# Altium PCB nrf52833_qiaa_var2.PcbDoc
Units mil, origin at the board's own origin, x right, y up, seen from the top; angles counter-clockwise.
Board outline 846.46 x 767.72 mil, 4 copper layers (Top Layer, Mid Layer 1, Mid Layer 2, Bottom Layer), stack 62.327 mil thick; 24 components, 60 nets, 139 pads, 108 vias.
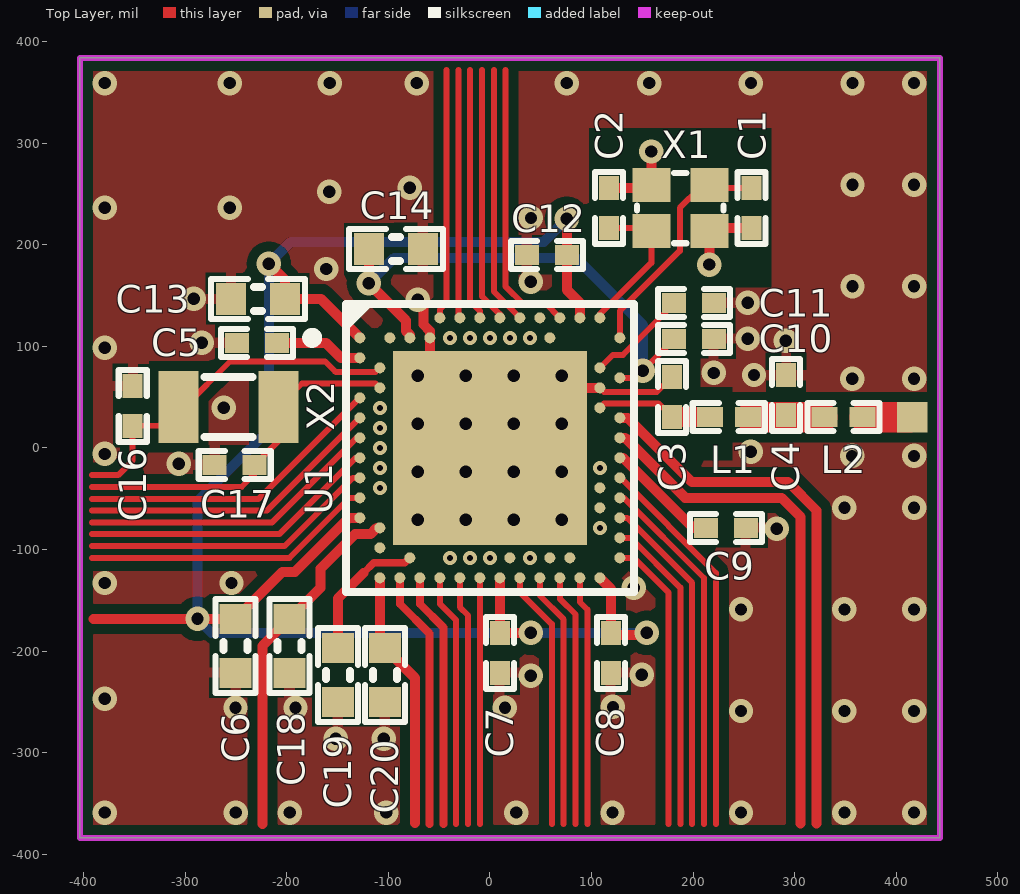
[diagram p0: Top Layer view]
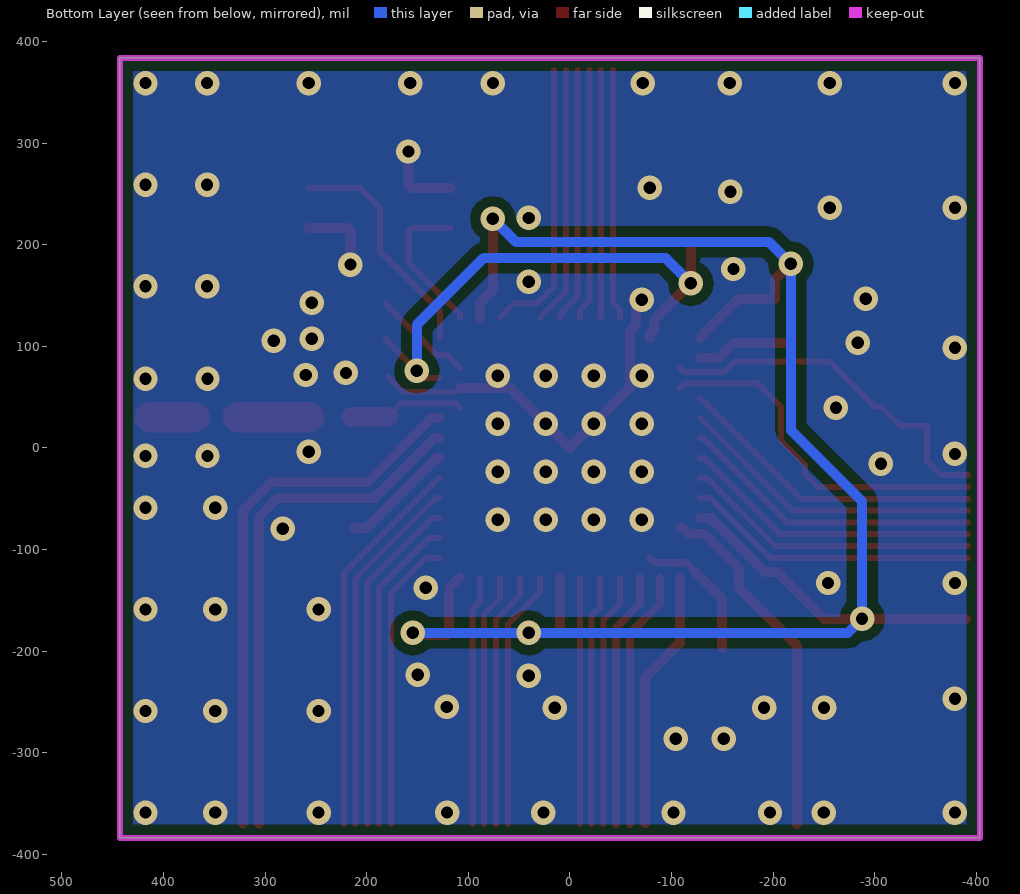
[diagram p1: Bottom Layer view, seen from below]
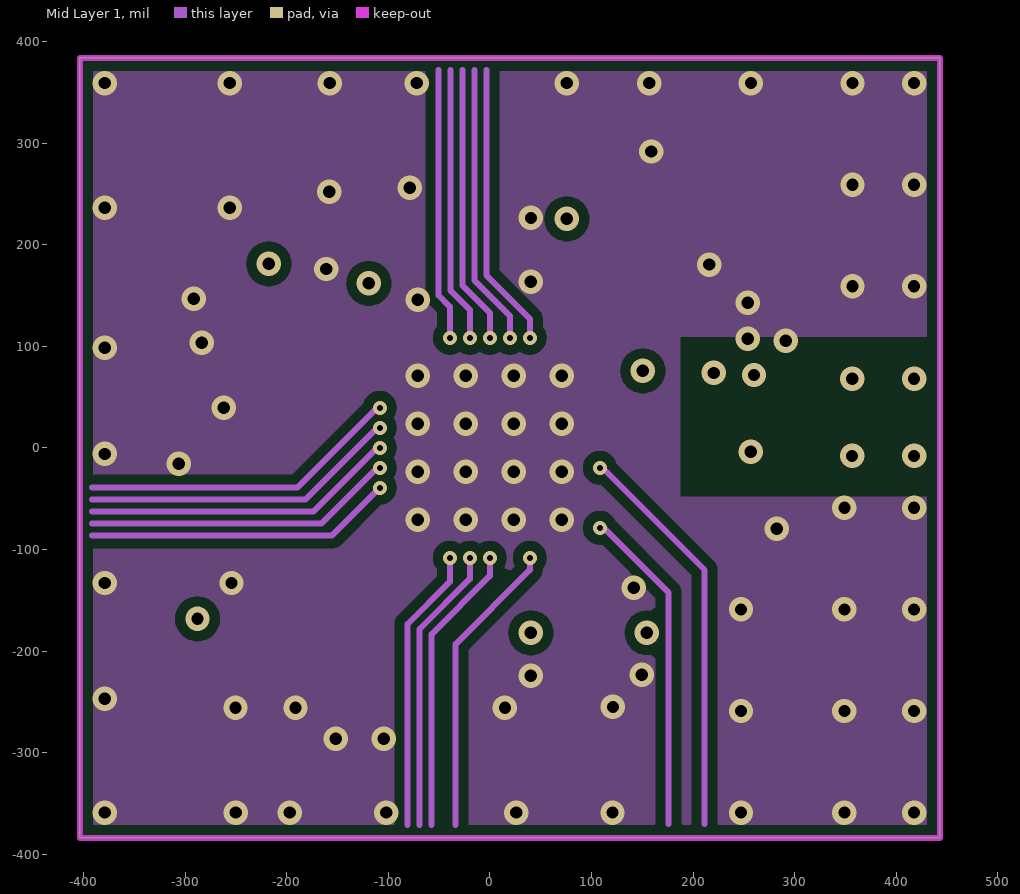
[diagram p2: Mid Layer 1]
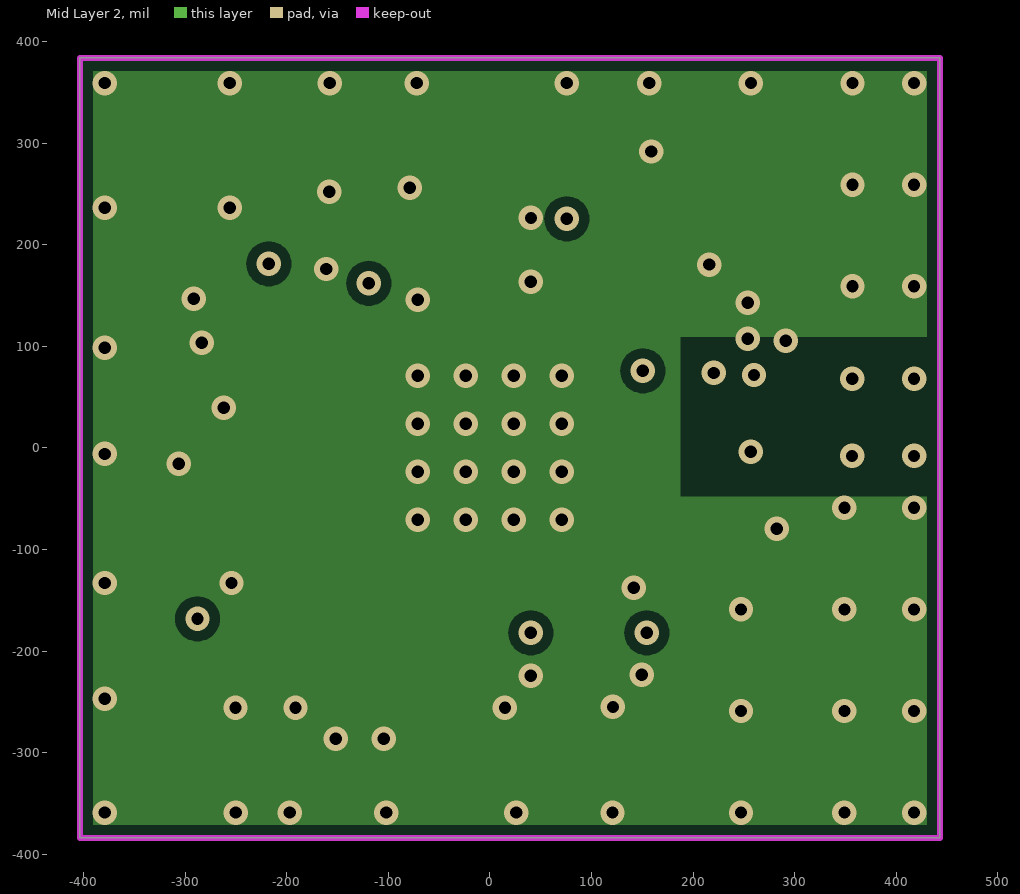
[diagram p3: Mid Layer 2]
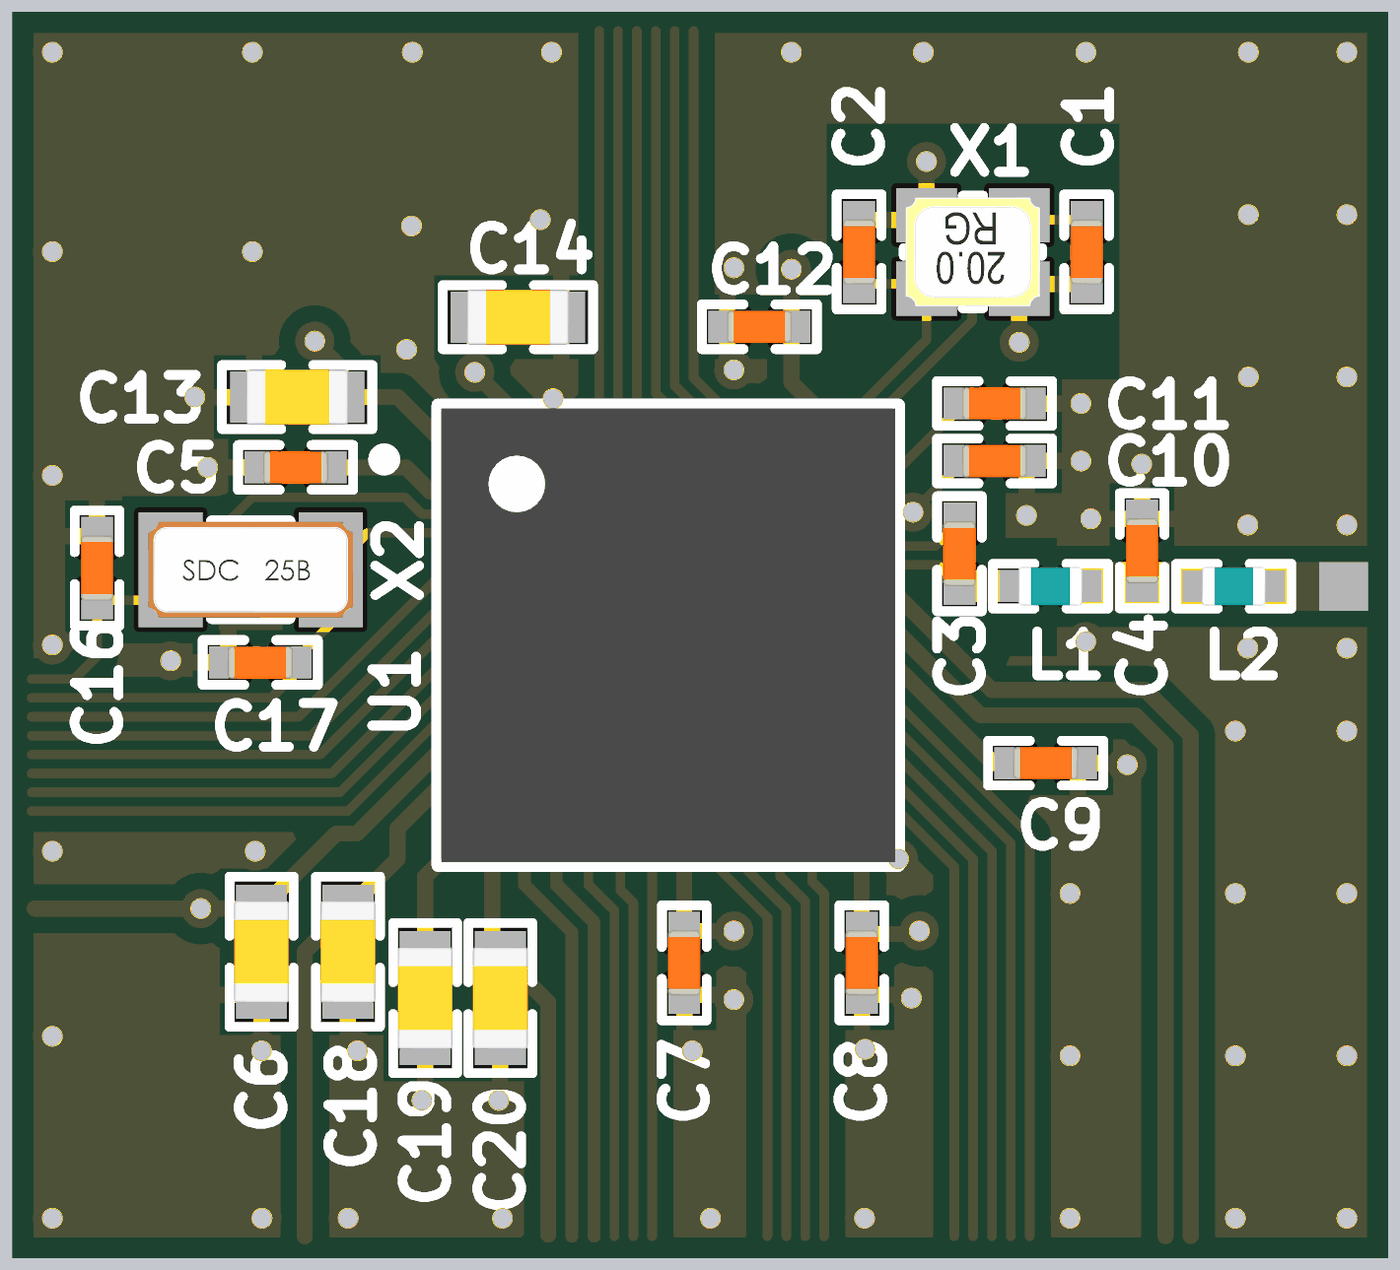
[diagram p4: 3D render of the assembled board from above, using the file's embedded part models]

## Layer stack, top to bottom
Top Solder: solder mask 0.4, Solder Resist, Dk 3.5
Top Layer: signal copper 1.4
Dielectric1: core 2.7559, FR-4, Dk 4.8
Mid Layer 1: signal copper 1.4173
Dielectric 3: prepreg 51.1811, Dk 4.2
Mid Layer 2: signal copper 1.4173
Dielectric 2: core 2.7559, Dk 4.2
Bottom Layer: signal copper 1.4
Bottom Solder: solder mask 0.4, Solder Resist, Dk 3.5

## Board outline
-403.54,-383.86 442.91,-383.86 442.91,383.86 -403.54,383.86

## Design rules (kind name [scope] priority, off if disabled: settings)
Clearance Polygon_ANT [(InNamedPolygon('Top_Layer-GND')) or  (InNamedPolygon('Mid_Layer_1-GND')) or (InNamedPolygon('Mid_Layer_2-GND')) or (InNamedPolygon('Bottom_Layer-GND')) vs InNet('RF')] p1: gap=10 ignorepadtopadclearanceinfootprint=FALSE
Clearance Polygon [(InNamedPolygon('Top_Layer-GND')) or  (InNamedPolygon('Mid_Layer_1-GND')) or (InNamedPolygon('Mid_Layer_2-GND')) or (InNamedPolygon('Bottom_Layer-GND'))] p2: gap=10 ignorepadtopadclearanceinfootprint=FALSE except(0: Arc-Hole Track-Hole SMDPad-Hole THPad-Hole Via-Hole Fill-Hole Poly-Hole Region-Hole Text-Hole)
Clearance Clearance_Top [OnLayer('Top Layer')] p3: gap=5.71 ignorepadtopadclearanceinfootprint=FALSE except(0: Arc-Hole Track-Hole SMDPad-Hole THPad-Hole Via-Hole Fill-Hole Poly-Hole Region-Hole Text-Hole)
Clearance [All] p4: gap=5.91 ignorepadtopadclearanceinfootprint=FALSE
ComponentClearance [All] p1 off: gap=10 collisioncheckmode=3 verticalgap=10 showdistances=FALSE
FabricationTestPointUsage TestPointUsage [All] p1: valid=0 allowmultiple=FALSE
FabricationTestpoint Testpoint [All] p1: side=3 testpointundercomponent=TRUE minsize=40 maxsize=100 preferedsize=60 minholesize=0 maxholesize=40 preferedholesize=32 testpointgrid=1 allowsidetop=TRUE allowsidebottom=TRUE usegrid=TRUE gridtolerance=0.01
Height [All] p1 off: minheight=0 maxheight=1000 prefheight=500
HoleSize [All] p1: absolutevalues=TRUE maxlimit=160 minlimit=3.94 maxpercent=80.000 minpercent=20.000
MinimumAnnularRing [All] p1 off: minimumring=6
PolygonConnect PolygonConnect_1 [isVia and innet(gnd)] p1: connectstyle=Direct reliefconductorwidth=10 reliefentries=4 polygonreliefangle="90 Angle" airgapwidth=10
PolygonConnect [All] p2: connectstyle=Relief reliefconductorwidth=10 reliefentries=4 polygonreliefangle="90 Angle" airgapwidth=10
RoutingVias [All] p1: holewidth=12 width=24 viastyle="Through Hole" minholewidth=3.94 minwidth=11.81 maxholewidth=12 maxwidth=24
SilkToSolderMaskClearance SilkscreenOverComponentPads [IsPad] p1: minsilkscreentomaskgap=10 clearancetoexposedcopper=TRUE
SolderMaskExpansion [All] p1: expansion=3 istentingtop=FALSE
Width [All] p1: maxlimit=78.74 minlimit=5.71 preferedwidth=5.91 minimp=50.000000 maximp=50.000000 favimp=50.000000
24 further rules are at their usual default settings.

## Components (designator, comment, footprint, x,y, rotation, side; value= is the part's Value field where it differs from the comment)
C1 "12pF" CAPC1005X04L 257.45,236.04 r270 top
C2 "12pF" CAPC1005X04L 117.45,236.04 r90 top
C3 "1.0pF" CAPC1005X04L 179.2,50.21 r270 top
C4 "1.2pF" CAPC1005X04L 291.6,52 r270 top
C5 "100nF" CAPC1005X04L -229.33,103.35 r180 top
C6 "4.7µF" CAPC1608X06L -250.28,-194.88 r270 top
C7 "100nF" CAPC1005X04L 9.84,-201.77 r270 top
C8 "100nF" CAPC1005X04L 119.09,-201.77 r270 top
C9 "820pF" CAPC1005X04L 232.28,-78.74 r0 top
C10 "N.C." CAPC1005X04L 200.79,107.28 r180 top
C11 "100pF" CAPC1005X04L 200.79,142.72 r0 top
C12 "100nF" CAPC1005X04L 56.1,189.96 r180 top
C13 "1.0µF" CAPC1608X06L -228.35,146.65 r180 top
C14 "1.0µF" CAPC1608X06L -92.52,195.87 r180 top
C16 "12pF" CAPC1005X04L -351.47,41.34 r90 top
C17 "12pF" CAPC1005X04L -251.08,-16.73 r180 top
C18 "4.7µF" CAPC1608X06L -197.13,-194.88 r270 top
C19 "4.7µF" CAPC1608X06L -149.61,-223.43 r270 top
C20 "4.7µF" CAPC1608X06L -103.35,-223.43 r270 top
L1 "4.7nH" INDC1005X04L 235.2,30.21 r0 top
L2 "2.2nH" INDC1005X04L 348,30.2 r0 top
U1 "nRF52833-QIAA" AQFN50P700X700X85_HS-74N 0,0 r0 top locked
X1 "32MHz" BT-XTAL_2016 187.45,236.04 r180 top
X2 "32.768kHz" XTAL_3215 -256.98,40.35 r0 top

## Footprints (in the part's own frame and the unit in brackets; to place one, negate y for a bottom-side part, rotate by r counter-clockwise, add the part's x,y. Pads: shape width x height; smd on the part's side, far side on the other; paste and mask are expansions set on the pad)
AQFN50P700X700X85_HS-74N [mm] "AQFN, 73-Leads, Body 7.00x7.00mm, Pitch 0.50mm, Thermal Pad 4.95x4.95mm, IPC Medium Density"
  rect 4.85x4.85 smd mask+0.05: 74(0,0)
  round 0.275 smd paste+0.012 mask+0.05: A8(-1.25,3.25) A10(-0.75,3.25) A12(-0.25,3.25) A14(0.25,3.25) A16(0.75,3.25) A18(1.25,3.25) A20(1.75,3.25) A22(2.25,3.25) A23(2.75,3.25) AA24(3.25,-2.25) AB2(-2.75,-2.5) AC5(-2,-2.75) AC9(-1,-2.75) AC11(-0.5,-2.75) AC13(0,-2.75) AC15(0.5,-2.75) AC17(1,-2.75) AC19(1.5,-2.75) AC21(2,-2.75) AC24(3.25,-2.75) AD2(-2.75,-3.25) AD4(-2.25,-3.25) AD6(-1.75,-3.25) AD8(-1.25,-3.25) AD10(-0.75,-3.25) AD12(-0.25,-3.25) AD14(0.25,-3.25) AD16(0.75,-3.25) AD18(1.25,-3.25) AD20(1.75,-3.25) AD22(2.25,-3.25) AD23(2.75,-3.25) B1(-3.25,2.75) B3(-2.5,2.75) B5(-2,2.75) B7(-1.5,2.75) B9(-1,2.75) B11(-0.5,2.75) B13(0,2.75) B15(0.5,2.75) B17(1,2.75) B19(1.5,2.75) B24(3.25,2.75) C1(-3.25,2.25) D2(-2.75,2) D23(2.75,2) E24(3.25,1.75) F2(-2.75,1.5) F23(2.75,1.5) G1(-3.25,1.25) H2(-2.75,1) H23(2.75,1) J1(-3.25,0.75) J24(3.25,0.75) K2(-2.75,0.5) L1(-3.25,0.25) L24(3.25,0.25) M2(-2.75,0) N1(-3.25,-0.25) N24(3.25,-0.25) P2(-2.75,-0.5) P23(2.75,-0.5) R1(-3.25,-0.75) R24(3.25,-0.75) T2(-2.75,-1) T23(2.75,-1) U1(-3.25,-1.25) U24(3.25,-1.25) V23(2.75,-1.5) W1(-3.25,-1.75) W24(3.25,-1.75) Y2(-2.75,-2) Y23(2.75,-2)
  silkscreen extent -4.56,-3.6 3.6,3.6, body extent -3.55,-3.55 3.55,3.55, height 0.85
BT-XTAL_2016 [mm] "Crystal 2.0 x 1.6 mm"
  rect 0.95x0.85 smd: 1(-0.725,-0.575) 2(0.725,-0.575) 3(0.725,0.575) 4(-0.725,0.575)
  silkscreen extent -1.08,-0.88 1.08,0.88, body extent -1.05,-0.85 1.05,0.85, height 0.56
CAPC1005X04L [mm] "Chip Capacitor, 2-Leads, Body 1.0x0.5mm, IPC High Density"
  rect 0.6x0.5 smd: 1(-0.5,0) 2(0.5,0)
  silkscreen extent -0.9,-0.35 0.9,0.35, body extent -0.51,-0.25 0.51,0.25, height 0.5
CAPC1608X06L [mm] "Chip Capacitor, 2-Leads, Body 1.6x0.8mm, IPC High Density"
  rect 0.75x0.8 smd: 1(-0.675,0) 2(0.675,0)
  silkscreen extent -1.17,-0.5 1.17,0.5, body extent -0.8,-0.43 0.8,0.43, height 0.8
INDC1005X04L [mm] "Chip Inductor, 2-Leads, Body 1.0x0.5mm, IPC High Density"
  rect 0.65x0.5 smd: 1(-0.475,0) 2(0.475,0)
  silkscreen extent -0.9,-0.35 0.9,0.35, body extent -0.5,-0.3 0.5,0.3, height 0.5
XTAL_3215 [mm] "XTAL SMD 3.2 x 1.5 mm"
  rect 1x1.8 smd: 1(-1.25,0) 2(1.25,0)
  silkscreen extent -0.6,-0.75 0.6,0.75, body extent -1.6,-0.75 1.6,0.75, height 0.81

## Part data
C1 C2 C16 C17: library part C0402-12p, "Capacitor, NP0, ±2%", Footprint Doc=0402, LatestRevisionDate=2011-05-11, Note=50V, Part Number=C0402-12p, Pin Count=2, Published=2009-05-08, Publisher="Nordic Semiconductor"
C3: library part C0402-1.0p, "Capacitor, NP0, ±5%", Footprint Doc=0402, LatestRevisionDate=2017-02-23, Note=50V, Part Number=C0402-1.0p, Pin Count=2, Published=2009-05-08, Publisher="Nordic Semiconductor"
C4: library part C0402-1.2p, "Capacitor, NP0, ±5%", Footprint Doc=0402, LatestRevisionDate=2011-05-11, Note=50V, Part Number=C0402-1.2p, Pin Count=2, Published=2009-05-08, Publisher="Nordic Semiconductor"
C5 C7 C8 C12: library part C0402-100n, "Capacitor, X7R, ±10%", Footprint Doc=0402, LatestRevisionDate=2009-11-23, Note=16V, Part Number=C0402-100n, Pin Count=2, Published=2009-05-08, Publisher="Nordic Semiconductor"
C6 C19: library part C0603-4µ7-6.3V-X7R, "Capacitor, X7R, ±10%", Footprint Doc=0603, LatestRevisionDate=2015-06-10, Note=6.3V, Part Number=C0603-4µ7-6.3V-X7R, Pin Count=2, Published=2015-06-10, Publisher="Nordic Semiconductor"
C9: library part C0402-820p, "Capacitor, NP0, ±5%", Assembly="Not required for Bxx and later", Footprint Doc=0402, LatestRevisionDate=2009-05-08, Note=50V, Part Number=C0402-820p, Pin Count=2, Published=2009-05-08, Publisher="Nordic Semiconductor"
C10: library part C0402-N.C., "Not mounted", Assembly="Not mounted", Footprint Doc=0402, LatestRevisionDate=2009-05-08, Part Number=C0402-N.C., Pin Count=2, Published=2009-05-08, Publisher="Nordic Semiconductor"
C11: library part C0402-100p, "Capacitor, NP0, ±5%", Footprint Doc=0402, LatestRevisionDate=2009-05-08, Note=50V, Part Number=C0402-100p, Pin Count=2, Published=2009-05-08, Publisher="Nordic Semiconductor"
C13 C14: library part C0603-1µ0, "Capacitor, X7R, ±10%", Footprint Doc=0603, LatestRevisionDate=2013-06-05, Note=16V, Part Number=C0603-1µ0, Pin Count=2, Published=2009-05-08, Publisher="Nordic Semiconductor"
C18 C20: library part C0603-4µ7-10V-X7S, "Capacitor, X7S, ±10%", Footprint Doc=0603, LatestRevisionDate=2016-08-15, Note=10V, Part Number=C0603-4µ7-10V-X7S, Pin Count=2, Published=2016-08-15, Publisher="Nordic Semiconductor"
L1: library part L0402-4n7, "High frequency chip inductor ±5%", Footprint Doc=0402, LatestRevisionDate=2012-09-19, Note="High frequency chip inductor ±5%", Part Number=L0402-4n7, Pin Count=2, Published=2009-05-08, Publisher="Nordic Semiconductor"
L2: library part L0402-2n2, "High frequency chip inductor ±5%", Footprint Doc=0402, LatestRevisionDate=2012-09-19, Note="High frequency chip inductor ±5%", Part Number=L0402-2n2, Pin Count=2, Published=2009-05-08, Publisher="Nordic Semiconductor"
U1: "Multi-protocol Bluetooth Low Energy, IEEE 802.15.4, ANT and 2.4GHz proprietary system-on-chip", Manufacturer="Nordic Semiconductor", Footprint Doc=AQFN-73, LatestRevisionDate=2018-12-03, Manufacturer Part Number=nRF52833-QIAA, Part Number=nRF52833-QIAA, Pin Count=73, Published=2018-12-03, Publisher="Nordic Semiconductor"
X1: library part XTAL_SMD2016_32MHz_8pF_General, "XTAL SMD 2016, 32MHz, Cl=8pF, Total Tol: ±40ppm", Footprint Doc=XTAL_2016, LatestRevisionDate=2016-08-19, Part Number=XTAL_SMD2016_32MHz_8pF_General, Pin Count=4, Published=2016-08-19, Publisher="Nordic Semiconductor"
X2: library part XTAL_SMD3215_32.768kHz_9pF_General, "XTAL SMD 3215, 32.768kHz, Cl=9pF, Total Tol: ±50ppm", Footprint Doc=XTAL_3215, LatestRevisionDate=2016-08-19, Part Number=XTAL_SMD3215_32.768kHz_9pF_General, Pin Count=2, Published=2016-08-19, Publisher="Nordic Semiconductor"

## Free pads (board coordinates)
  rect 30x30 smd mask+3: 0(415.63,30)
  round 11.81 on Mech16: 1(-108.27,-39.37) 1(-108.27,-19.69) 1(-108.27,0) 1(-108.27,19.68) 1(-108.27,39.37) 1(-39.37,-108.27) 1(-39.37,108.27) 1(-19.69,-108.27) 1(-19.69,108.27) 1(0,-108.27) 1(0,108.27) 1(19.69,108.27) 1(39.37,-108.27) 1(39.37,108.27) 1(108.27,-78.74) 1(108.27,-19.69)

## Via types
v1: diameter 24, hole 12, Top Layer to Bottom Layer, tented both sides, 92 vias
v2: diameter 13.78, hole 5.91, Top Layer to Mid Layer 1, tented top, 16 vias

## Nets (pads, with @x,y where several pads share a name; then routed paths per layer and width w, separated by ;. In a path a pad name is that pad's centre, name@x,y a point inside that pad or via, vN(x,y) a via of type N, cw(c..) or ccw(c..) an arc to the next point about the centre after c; other vN are vias at no path point)
D+: U1.AD6 | length 251.7
  Top Layer w7.87: U1.AD6 -68.9,-153.54 -45.67,-176.77 -45.67,-370.08
D-: U1.AD4 | length 254.3
  Top Layer w7.87: U1.AD4 -88.58,-153.54 -59.25,-182.87 -59.25,-370.08
DEC1: C5.1 U1.C1 | length 87.8
  Top Layer w9.84: C5.1 -161.42,103.35 -146.65,88.58 U1.C1
DEC3: C11.1 U1.D23 | length 100
  Top Layer w5.91: U1.D23 108.49,78.74 121.28,91.54 131.13,91.54 181.1,141.51 C11.1
DEC4_6: C10.2 C14.2 U1.B5 U1.E24 | length 526.6
  Top Layer w5.91: U1.E24 143.7,68.9 v1(150.59,75.79) 181.1,106.3 C10.2
  Top Layer w9.84: C14.2 v1(-119.09,161.89) -82.68,125.48 -82.68,115.21 -78.74,111.27 U1.B5
  Bottom Layer w9.84: v1(-119.09,161.89) -93.99,187 84.65,187 150.59,121.06 v1(150.59,75.79)
GND: C1.2 C2.2 C3.1 C4.1 C5.2 C6.2 C7.2 C8.2 C9.2 C10.1 C11.2 C12.2 C13.2 C14.1 C16.2 C17.2 C18.2 C19.2 C20.2 U1.74 U1.B7 U1.F23 X1.2 X1.4 | length 531
  Top Layer w5.71: U1.F23 112.4,54.92 164.22,54.92 C3.1
  Top Layer w9.84: v1@-65.26,143.41 -65.26,121.31 -59.06,115.11 U1.B7 -59.06,59.06 U1.74 v1(23.62,23.62) 59.06,59.06 U1.F23 ; C2.2 155.95,255.72 X1.2 ; X1.2@157.68,259.9 X1.2 ; v1(158.91,291.71) X1.2 ; v1(215.99,180.37) X1.4 ; X1.4@218.94,216.35 C1.2
  other v1: -379,-359 -250,-359 -197,-359 -102,-359 26,-359 120.8,-359 247.22,-359 349,-359 417.64,-359 -151.57,-286.42 -104.33,-286.42 247.22,-259 349,-259 417.64,-259 -250.28,-255.91 -191.22,-255.91 14.83,-255.91 121.09,-254.95 -379,-247 40.35,-224.41 149.61,-223.43 247.22,-159 349,-159 417.64,-159 141.73,-137.8 -379,-133 -254.21,-133 282.48,-79.72 -70.87,-70.87 -23.62,-70.87 23.62,-70.87 70.87,-70.87 349,-59 417.64,-59 -70.87,-23.62 -23.62,-23.62 23.62,-23.62 70.87,-23.62 -306.18,-15.75 356.62,-7.94 417.64,-7.94 -379,-6 256.89,-3.94 -70.87,23.62 -23.62,23.62 70.87,23.62 -261.91,39.37 356.64,67.9 417.64,67.9 -70.87,70.87 -23.62,70.87 23.62,70.87 70.87,70.87 260,71.69 220.44,73.79 -379,98.43 -283.46,103.35 291.34,105.35 253.94,107.28 253.94,142.72 -70.87,145.67 -291.34,146.65 357,159 417.64,159 40.35,163.39 -161,176 40.42,226.28 -379,236.22 -255.91,236.22 -158,252 -78.74,255.91 357,259 417.64,259 -379,359 -255.91,359 -157.48,359 -71.85,359 75.74,359 157,359 257,359 357,359 417.64,359
NetC3_2: C3.2 L1.1 U1.H23 | length 113.7
  Top Layer w5.71: U1.H23 112.4,43.5 166.15,43.5 179.32,30.34 C3.2@179.51,30.14
  Top Layer w20: C3.2@179.32,30.34 L1.1@214.51,30.34
NetC4_2: C4.2 L1.2 L2.1 | length 70.4
  Top Layer w30: L1.2@256.6,30 L2.1@327,30
NetC9_1: C9.1 U1.N24 | length 113.2
  Top Layer w9.84: U1.N24 130.96,-9.84 199.85,-78.74 C9.1
NetC19_1: C19.1 U1.AC5 | length 135.9
  Top Layer w7.24: -124.31,-123.14 -114.37,-113.21 -83.68,-113.21 U1.AC5
  Top Layer w9.84: C19.1 -149.61,-148.44 -124.31,-123.14
P0.00/XL1: C16.1 U1.D2 X2.1 | length 355.9
  Top Layer w5.71: C16.1 -324.9,21.65 X2.1 -300.2,40.35 -255.61,84.94 -162.08,84.94 -152.24,75.1 -151.87,75.1 -151.38,74.61 -112.4,74.61 U1.D2
  Top Layer w5.91: -391.73,-26.97 -365.76,-26.97 -351.47,-12.68 C16.1
P0.01/XL2: C17.1 U1.F2 X2.2 | length 352.1
  Top Layer w5.71: C17.1 -207.77,6.89 X2.2 -184.94,63.19 -112.4,63.19 U1.F2
  Top Layer w5.91: -391.73,-38.58 -244.39,-38.58 -231.39,-25.59 C17.1
P0.02/AIN0: U1.A12 | length 248
  Top Layer w5.91: -19.29,372.05 -19.29,144.29 -9.84,134.84 U1.A12
P0.03/AIN1: U1.B13 | length 274.8
  Mid Layer 1 w5.91: -26.76,372 -26.76,159.65 0,132.89 v2(0,108.27)
P0.04/AIN2: U1.J1 | length 301.6
  Top Layer w5.91: -391.73,-61.81 -219.51,-61.81 -128.17,29.53 U1.J1
P0.05/AIN3: U1.K2 | length 312.5
  Mid Layer 1 w5.91: -391.6,-50.81 -181.35,-50.81 -110.85,19.68 v2(-108.27,19.68)
P0.06: U1.L1 | length 298.3
  Top Layer w5.91: -391.73,-73.43 -214.17,-73.43 -130.91,9.84 U1.L1
P0.07: U1.M2 | length 309.3
  Mid Layer 1 w5.91: -391.6,-62.62 -173.48,-62.62 -110.85,0 v2(-108.27,0)
P0.08: U1.N1 | length 294.9
  Top Layer w5.91: -391.73,-85.04 -207.09,-85.04 -131.89,-9.84 U1.N1
P0.09/NFC1: U1.L24 | length 512.3
  Top Layer w9.84: U1.L24 133.26,9.84 192.32,-49.21 287.21,-49.21 306,-68 306,-370
P0.10/NFC2: U1.J24 | length 539.8
  Top Layer w9.84: U1.J24 135.57,29.53 198.76,-33.66 293.65,-33.66 321.55,-61.56 321.55,-370
P0.11: U1.T2 | length 303.7
  Mid Layer 1 w5.91: -391.6,-86.24 -155.14,-86.24 v2(-108.27,-39.37) v2@-109.18,-39.37
P0.12: U1.U1 | length 288.2
  Top Layer w5.91: -391.73,-108.27 -197.16,-108.27 -138.1,-49.21 U1.U1
P0.13: U1.AD8 | length 248.8
  Top Layer w5.91: U1.AD8 -49.21,-153.54 -33.07,-169.69 -33.07,-370.08
P0.14: U1.AC9 | length 280
  Mid Layer 1 w5.91: -80.99,-371 -80.99,-173.58 -39.37,-131.96 v2(-39.37,-108.27)
P0.15: U1.AD10 | length 245.5
  Top Layer w5.91: U1.AD10 -29.53,-156.8 -21.46,-164.87 -21.46,-370.08
P0.16: U1.AC11 | length 283.2
  Mid Layer 1 w5.91: -69.18,-371 -69.18,-178.47 -19.69,-128.98 v2(-19.69,-108.27)
P0.17: U1.AD12 | length 242.1
  Top Layer w5.91: -9.84,-370.08 U1.AD12
P0.18/RESET: U1.AC13 | length 286.5
  Mid Layer 1 w6: -57.32,-371 -57.32,-183.39 0,-126.06 v2(0,-108.27)
P0.19: U1.A14 | length 251.4
  Top Layer w5.91: -7.68,372.05 -7.68,149.1 9.84,131.58 U1.A14
P0.20: U1.AD16 | length 255.2
  Top Layer w5.91: U1.AD16 29.53,-142.04 61.02,-173.54 61.02,-370.08
P0.21: U1.AC17 | length 293
  Mid Layer 1 w5.91: -33.65,-371 -33.65,-193.19 39.37,-120.17 v2(39.37,-108.27)
P0.22: U1.AD18 | length 251.8
  Top Layer w5.91: U1.AD18 49.21,-145.3 72.68,-168.77 72.68,-370.08
P0.23: U1.B17 | length 281.3
  Mid Layer 1 w5.91: -3.14,372 -3.14,169.44 39.37,126.93 v2(39.37,108.27)
P0.24: U1.AD20 | length 248.5
  Top Layer w5.91: U1.AD20 68.9,-148.56 84.3,-163.96 ; 84.35,-370.08 84.35,-163.96
P0.25: U1.A20 | length 279.3
  Top Layer w5.91: 15.55,372.05 15.55,158.72 32.25,142.03 55.04,142.03 U1.A20@68.9,128.17
P0.26: U1.G1 | length 305
  Top Layer w5.91: -391.73,-50.2 -227.58,-50.2 -128.17,49.21 U1.G1
P0.27: U1.H2 | length 315.8
  Mid Layer 1 w5.91: -391.6,-39 -189.22,-39 -110.85,39.37 v2(-108.27,39.37)
P0.28/AIN4: U1.B11 | length 271.6
  Mid Layer 1 w5.91: -38.57,372 -38.57,154.76 -19.69,135.87 v2(-19.69,108.27)
P0.29/AIN5: U1.A10 | length 244.7
  Top Layer w5.91: -30.91,372.05 -30.91,129.33 U1.A10
P0.30/AIN6: U1.B9 | length 268.3
  Mid Layer 1 w5.91: -50.39,372 -50.39,149.87 -39.37,138.85 v2(-39.37,108.27)
P0.31/AIN7: U1.A8 | length 246.9
  Top Layer w5.91: U1.A8 -49.21,136.22 -42.52,142.91 -42.52,372.05
P1.00: U1.AD22 | length 245.2
  Top Layer w5.91: U1.AD22 88.58,-151.77 95.96,-159.15 95.96,-370.08
P1.01: U1.Y23 | length 321.7
  Mid Layer 1 w5.91: v2(108.27,-78.74) 112.18,-78.74 176,-142.57 176,-370.08
P1.02: U1.W24 | length 335
  Top Layer w5.91: U1.W24 135.21,-68.9 199.23,-132.91 199.23,-370.08
P1.03: U1.B15 | length 278.1
  Mid Layer 1 w5.91: -14.95,372 -14.95,164.55 19.68,129.91 v2(19.68,108.27)
P1.04: U1.U24 | length 357.5
  Top Layer w5.91: U1.U24 131.95,-49.21 210.84,-128.1 210.84,-370.08
P1.05: U1.A16 | length 254.7
  Top Layer w5.91: 3.94,372.05 3.94,153.91 29.53,128.32 U1.A16
P1.06: U1.R24 | length 380.1
  Top Layer w5.91: U1.R24 128.69,-29.53 222.46,-123.29 222.46,-370.08
P1.07: U1.P23 | length 394.6
  Mid Layer 1 w5.91: v2(108.27,-19.69) 110.85,-19.69 211.43,-120.26 211.43,-370.08
P1.08: U1.P2 | length 306
  Mid Layer 1 w5.91: -391.6,-74.43 -165.6,-74.43 -110.85,-19.69 v2(-108.27,-19.69)
P1.09: U1.R1 | length 291.6
  Top Layer w5.91: -391.73,-96.65 -201.97,-96.65 -134.84,-29.53 U1.R1
RF: L2.2 pad.0 | length 44.4
  Top Layer w30: L2.2@369,30 pad.0@413.39,30
SWDCLK: U1.AA24 | length 312.4
  Top Layer w5.91: U1.AA24 138.47,-88.58 187.61,-137.72 187.61,-370.08
SWDIO: U1.AC24 | length 289.8
  Top Layer w5.91: U1.AC24 141.73,-108.27 176,-142.54 176,-370.08
VBUS: C20.1 U1.AD2 | length 255.4
  Top Layer w9.84: U1.AD2 -108.27,-191.93 C20.1 -73.82,-226.38 -73.82,-369.09
VDD_NRF: C6.1 C7.1 C8.1 C12.1 C13.1 U1.A22 U1.AD14 U1.AD23 U1.B1 U1.W1 | length 1883.4
  Top Layer w9.84: -389.91,-168.31 v1(-287.68,-168.31) C6.1 -204.02,-122.05 -191.73,-122.05 -138.58,-68.9 U1.W1 ; v1(-217.52,181.1) -201.77,165.35 C13.1 -166.34,146.65 U1.B1 ; U1.AD14 C7.1 v1(40.35,-182.09) ; C12.1 75.79,155.51 88.58,142.72 U1.A22 ; C12.1@75.79,195.87 v1(75.79,225.39) 75.79,190.94 C12.1@76.28,190.45 ; U1.AD23 119.09,-138.78 C8.1 121.06,-184.06 v1@154.53,-184.06
  Bottom Layer w9.84: v1(40.35,-182.09) -273.9,-182.09 v1(-287.68,-168.31) -287.68,-52.68 -217.52,17.48 v1(-217.52,181.1) -195.87,202.75 53.14,202.75 v1(75.79,225.39) ; v1(40.35,-182.09) v1(154.53,-182.09)
VDDH: C18.1 U1.Y2 | length 349.8
  Top Layer w9.84: -223.7,-370.08 -223.7,-194.88 C18.1 -166.61,-137.8 -166.61,-118.93 -132.67,-84.98 -117.51,-84.98 -111.27,-78.74 U1.Y2
XC1: C1.1 U1.B24 X1.1 | length 230.9
  Top Layer w5.91: U1.B24 127.95,134.77 187.01,193.82 187.01,236.22 206.51,255.72 C1.1
XC2: C2.1 U1.A23 X1.3 | length 149.1
  Top Layer w5.91: U1.A23 108.27,131.51 158.91,182.14 X1.3 155.95,216.35 C2.1
pads on no net: U1.A18 U1.AB2 U1.AC15 U1.AC19 U1.AC21 U1.B3 U1.B19 U1.T23 U1.V23

## Polygon pours and split planes (outlines as drawn)
GND on Mid Layer 2 "Mid_Layer_2-GND" (solid, remove dead copper, pour order 1002): -443.9,403.11 -443.9,-404.53 511.81,-404.53 511.81,403.11
GND on Mid Layer 1 "Mid_Layer_1-GND" (solid, remove dead copper, pour order 1004): -438.12,402.62 -438.12,-405.02 511.81,-405.02 511.81,402.62
GND on Bottom Layer "Bottom_Layer-GND" (solid, remove dead copper, pour order 1001): -436.02,411.42 -436.02,-399.61 511.81,-399.61 511.81,411.42
GND on Top Layer "Top_Layer-GND" (solid, remove dead copper, pour order 1000): -432.09,410 -432.09,-397.64 511.81,-397.64 511.81,410

## Keep-outs
Keep-Out Layer:
  the board outline again, w6

## Other copper
Top Layer:
  pour cut-out: 97.61,157.48 277.72,157.48 277.72,315.06 97.61,315.06
  pour cut-out: 131.2,-12.79 239.17,-12.79 239.17,60.04 207.68,60.04 207.68,101.21 131.2,101.21
  pour cut-out: 230,55.04 230,4.96 384.05,4.96 384.05,55.04
  pour cut-out: -269.96,-212.6 -269.96,-157.48 -125.46,-157.48 -125.46,-212.6
  pour cut-out: -177.17,-246.06 -177.17,-187.01 -78.74,-187.01 -78.74,-246.06
  pour cut-out: 9.84,-29.53 9.84,29.53 108.27,29.53 108.27,-29.53
  pour cut-out: 101.31,-156.99 59.55,-115.23 129.15,-45.63 170.91,-87.39
Mid Layer 1:
  pour cut-out: 482.28,-48.23 187.2,-48.23 187.2,109.25 482.28,109.25
Mid Layer 2:
  pour cut-out: 482.28,-48.23 187.2,-48.23 187.2,109.25 482.28,109.25

## Silkscreen, mask and mechanical layers (free items; w line width, h text height)
Mechanical 1:
  the board outline again, w6

## Dimensions
442.91,-383.86 to 442.91,383.86 on Mechanical 3
442.91,-383.86 to -403.54,-383.86 on Mechanical 3